# Altium PCB RcMPPT-BMS.PcbDoc (part 2 of 2)
Units mm, origin at the board's own origin, x right, y up, seen from the top; angles counter-clockwise.
Board outline 99.06 x 55.88 mm, 4 copper layers (Top Layer, Mid Layer 1, Mid Layer 2, Bottom Layer), stack 1.587 mm thick; 194 components, 140 nets, 605 pads, 158 vias.
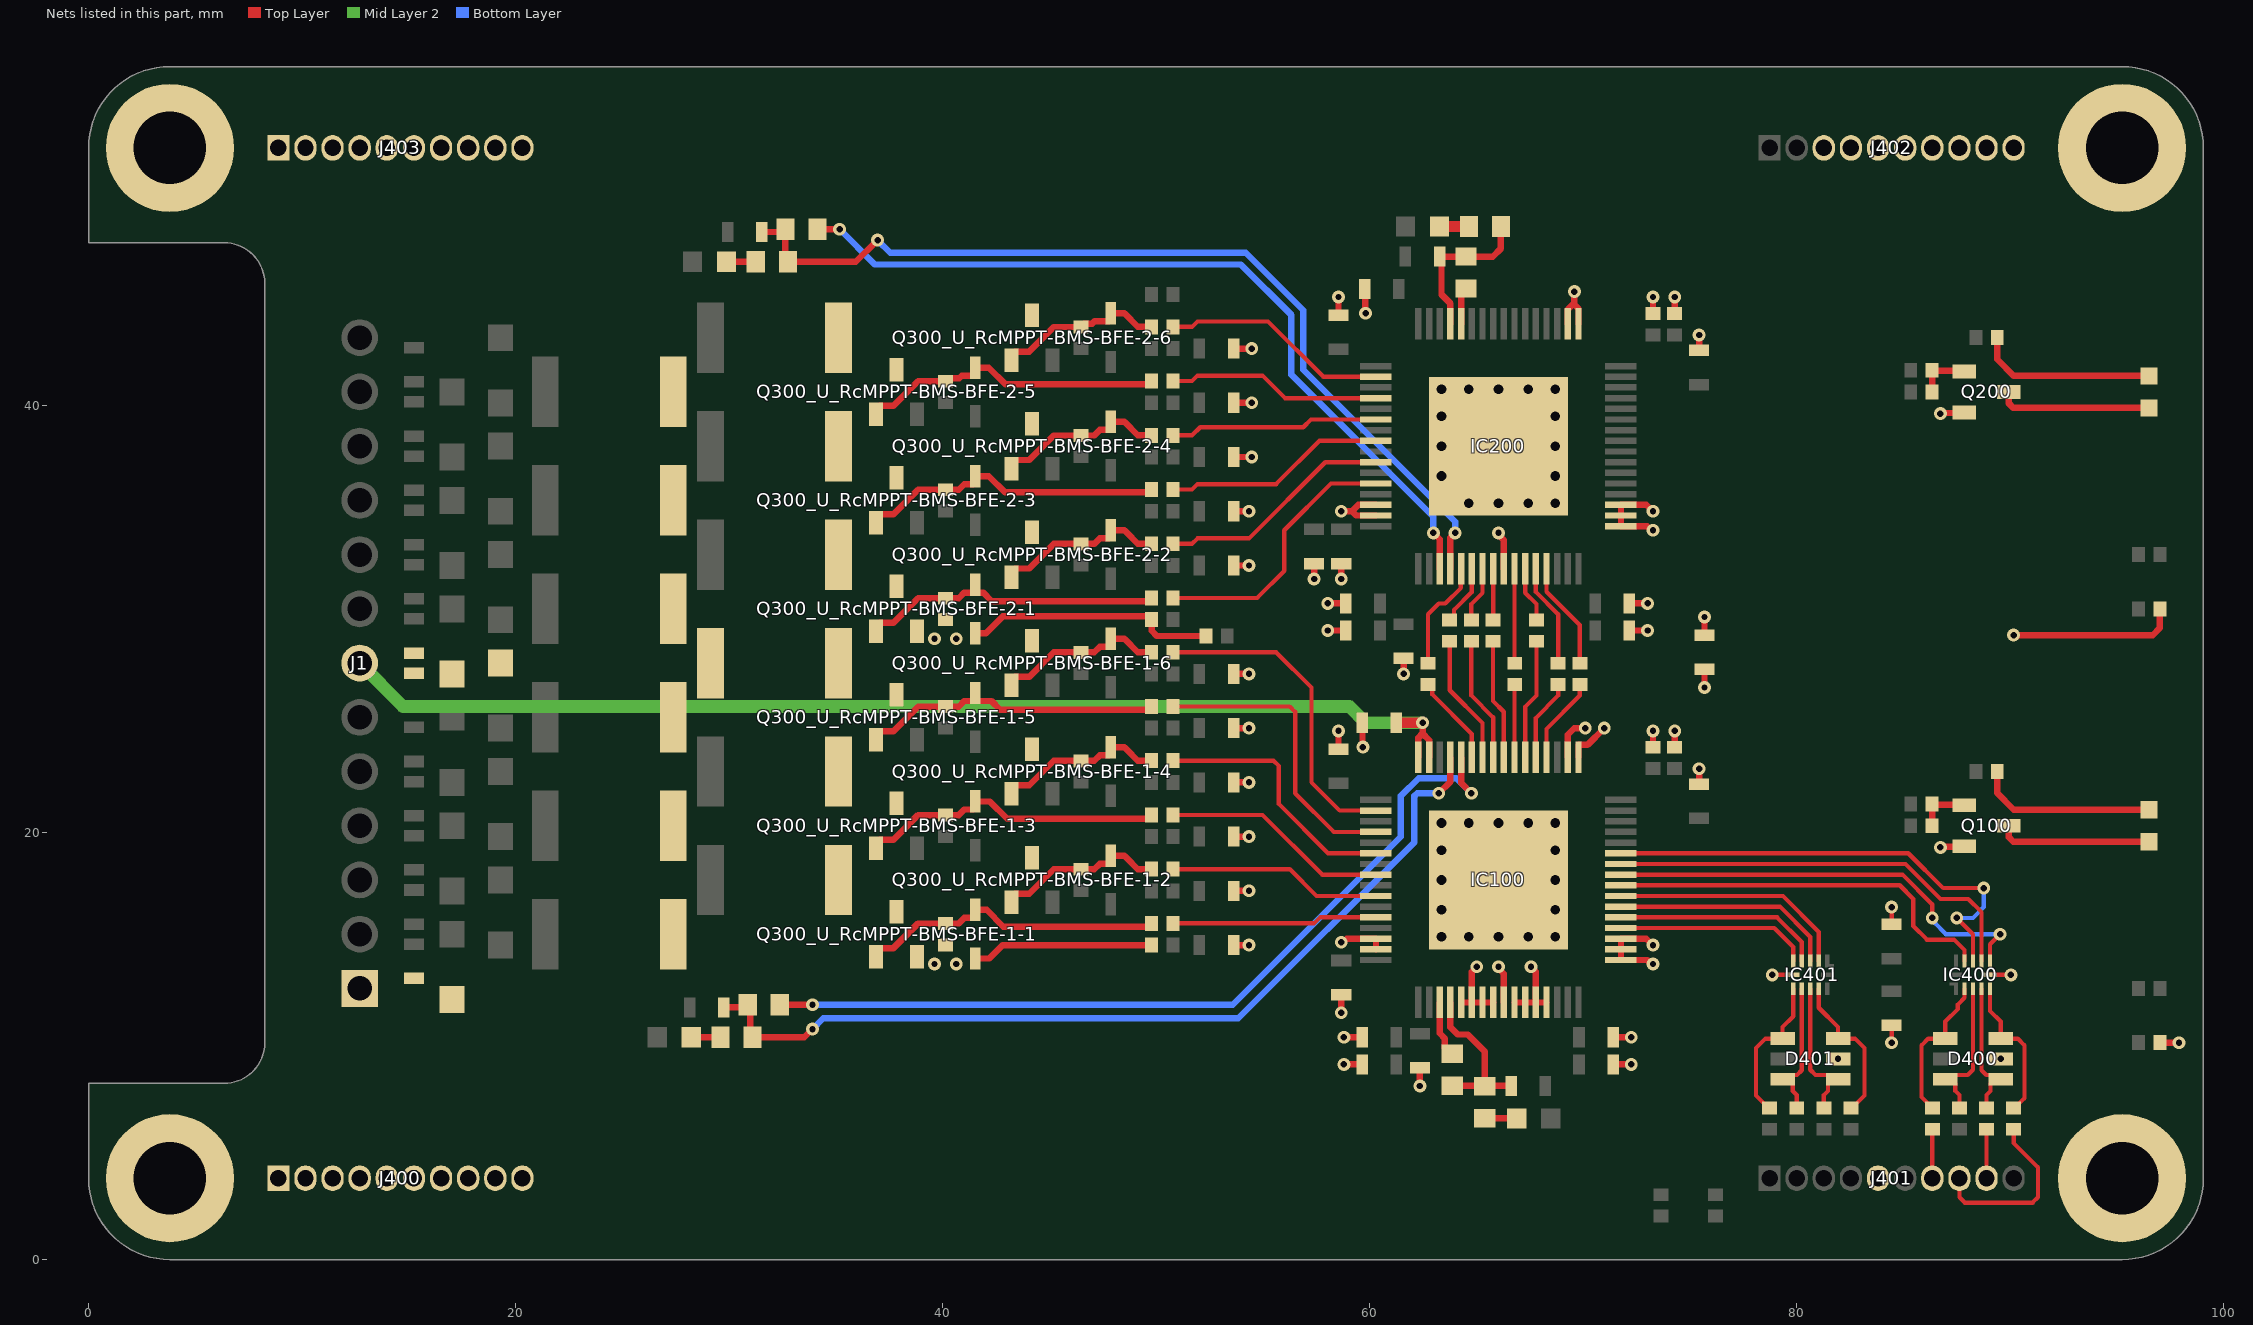
[diagram p4: the nets of this part, all layers, seen from the top]

## Via types
v1: diameter 0.6, hole 0.3, Top Layer to Bottom Layer, tented both sides, 127 vias
v2: diameter 0.85, hole 0.45, Top Layer to Bottom Layer, tented both sides, 31 vias

## Nets (pads, with @x,y where several pads share a name; then routed paths per layer and width w, separated by ;. In a path a pad name is that pad's centre, name@x,y a point inside that pad or via, vN(x,y) a via of type N, cw(c..) or ccw(c..) an arc to the next point about the centre after c; other vN are vias at no path point) (continued)
NetD301_U_RcMPPT-BMS-BFE-1-1_1: D301_U_RcMPPT-BMS-BFE-1-1.1 Q300_U_RcMPPT-BMS-BFE-1-1.1 R111.1 R301_U_RcMPPT-BMS-BFE-1-1.2 | length 14.5
  Top Layer w0.3: Q300_U_RcMPPT-BMS-BFE-1-1.1@36.886,14.19 36.886,14.415 37.061,14.59 37.704,14.59 38.854,15.74 R301_U_RcMPPT-BMS-BFE-1-1.2@40.132,15.74 40.759,15.74 41.022,16.003 41.429,16.003 41.529,16.103 D301_U_RcMPPT-BMS-BFE-1-1.1@41.529,16.378 42.067,16.378 42.85,15.596 49.642,15.596 49.792,15.746 R111.1@49.792,15.748
NetD301_U_RcMPPT-BMS-BFE-1-2_1: D301_U_RcMPPT-BMS-BFE-1-2.1 Q300_U_RcMPPT-BMS-BFE-1-2.1 R109.1 R301_U_RcMPPT-BMS-BFE-1-2.2 | length 8
  Top Layer w0.3: Q300_U_RcMPPT-BMS-BFE-1-2.1@43.236,16.73 43.236,16.955 43.411,17.13 44.054,17.13 45.204,18.28 R301_U_RcMPPT-BMS-BFE-1-2.2@46.482,18.28 47.109,18.28 47.372,18.543 47.779,18.543 47.879,18.643 D301_U_RcMPPT-BMS-BFE-1-2.1@47.879,18.918 48.519,18.918 48.64,18.797 49.149,18.288 R109.1@49.792,18.288
NetD301_U_RcMPPT-BMS-BFE-1-3_1: D301_U_RcMPPT-BMS-BFE-1-3.1 Q300_U_RcMPPT-BMS-BFE-1-3.1 R107.1 R301_U_RcMPPT-BMS-BFE-1-3.2 | length 14.5
  Top Layer w0.3: Q300_U_RcMPPT-BMS-BFE-1-3.1@36.886,19.27 36.886,19.495 37.061,19.67 37.704,19.67 38.854,20.82 R301_U_RcMPPT-BMS-BFE-1-3.2@40.132,20.82 40.759,20.82 41.022,21.083 41.429,21.083 41.529,21.183 D301_U_RcMPPT-BMS-BFE-1-3.1@41.529,21.458 42.218,21.458 43.026,20.65 49.642,20.65 49.792,20.8 R107.1@49.792,20.828
NetD301_U_RcMPPT-BMS-BFE-1-4_1: D301_U_RcMPPT-BMS-BFE-1-4.1 Q300_U_RcMPPT-BMS-BFE-1-4.1 R105.1 R301_U_RcMPPT-BMS-BFE-1-4.2 | length 8
  Top Layer w0.3: Q300_U_RcMPPT-BMS-BFE-1-4.1@43.236,21.81 43.236,22.035 43.411,22.21 44.054,22.21 45.204,23.36 R301_U_RcMPPT-BMS-BFE-1-4.2@46.482,23.36 47.109,23.36 47.372,23.623 47.779,23.623 47.879,23.723 D301_U_RcMPPT-BMS-BFE-1-4.1@47.879,23.998 48.519,23.998 48.64,23.877 49.149,23.368 R105.1@49.792,23.368
NetD301_U_RcMPPT-BMS-BFE-1-5_1: D301_U_RcMPPT-BMS-BFE-1-5.1 Q300_U_RcMPPT-BMS-BFE-1-5.1 R103.1 R301_U_RcMPPT-BMS-BFE-1-5.2 | length 14.4
  Top Layer w0.3: Q300_U_RcMPPT-BMS-BFE-1-5.1@36.886,24.35 36.886,24.575 37.061,24.75 37.704,24.75 38.854,25.9 R301_U_RcMPPT-BMS-BFE-1-5.2@40.132,25.9 40.759,25.9 41.022,26.163 41.429,26.163 D301_U_RcMPPT-BMS-BFE-1-5.1@41.529,26.263 ; D301_U_RcMPPT-BMS-BFE-1-5.1@41.529,26.538 D301_U_RcMPPT-BMS-BFE-1-5.1@41.529,26.263 ; R103.1@49.792,25.908 49.792,25.906 49.642,25.756 42.697,25.756 42.291,26.162 41.905,26.162 41.904,26.163 41.629,26.163 D301_U_RcMPPT-BMS-BFE-1-5.1@41.529,26.263
NetD301_U_RcMPPT-BMS-BFE-1-6_1: D301_U_RcMPPT-BMS-BFE-1-6.1 Q300_U_RcMPPT-BMS-BFE-1-6.1 R101.1 R301_U_RcMPPT-BMS-BFE-1-6.2 | length 8
  Top Layer w0.3: Q300_U_RcMPPT-BMS-BFE-1-6.1@43.236,26.89 43.236,27.115 43.411,27.29 44.054,27.29 45.204,28.44 R301_U_RcMPPT-BMS-BFE-1-6.2@46.482,28.44 47.109,28.44 47.372,28.703 47.779,28.703 47.879,28.803 D301_U_RcMPPT-BMS-BFE-1-6.1@47.879,29.078 48.519,29.078 49.149,28.448 R101.1@49.792,28.448
NetD301_U_RcMPPT-BMS-BFE-2-1_1: D301_U_RcMPPT-BMS-BFE-2-1.1 Q300_U_RcMPPT-BMS-BFE-2-1.1 R222.1 R301_U_RcMPPT-BMS-BFE-2-1.2 | length 14.4
  Top Layer w0.3: Q300_U_RcMPPT-BMS-BFE-2-1.1@36.886,29.43 36.886,29.655 37.061,29.83 37.704,29.83 38.854,30.98 R301_U_RcMPPT-BMS-BFE-2-1.2@40.132,30.98 40.759,30.98 41.022,31.243 41.429,31.243 D301_U_RcMPPT-BMS-BFE-2-1.1@41.529,31.343 ; D301_U_RcMPPT-BMS-BFE-2-1.1@41.529,31.618 D301_U_RcMPPT-BMS-BFE-2-1.1@41.529,31.343 ; R222.1@49.792,30.988 49.792,30.986 49.642,30.836 42.311,30.836 41.904,31.243 41.629,31.243 D301_U_RcMPPT-BMS-BFE-2-1.1@41.529,31.343
NetD301_U_RcMPPT-BMS-BFE-2-2_1: D301_U_RcMPPT-BMS-BFE-2-2.1 Q300_U_RcMPPT-BMS-BFE-2-2.1 R220.1 R301_U_RcMPPT-BMS-BFE-2-2.2 | length 8
  Top Layer w0.3: Q300_U_RcMPPT-BMS-BFE-2-2.1@43.236,31.97 43.236,32.195 43.411,32.37 44.054,32.37 45.204,33.52 R301_U_RcMPPT-BMS-BFE-2-2.2@46.482,33.52 47.109,33.52 47.372,33.783 47.779,33.783 47.879,33.883 D301_U_RcMPPT-BMS-BFE-2-2.1@47.879,34.158 48.519,34.158 48.64,34.037 49.149,33.528 R220.1@49.792,33.528
NetD301_U_RcMPPT-BMS-BFE-2-3_1: D301_U_RcMPPT-BMS-BFE-2-3.1 Q300_U_RcMPPT-BMS-BFE-2-3.1 R216.1 R301_U_RcMPPT-BMS-BFE-2-3.2 | length 14.5
  Top Layer w0.3: Q300_U_RcMPPT-BMS-BFE-2-3.1@36.886,34.51 36.886,34.735 37.061,34.91 37.704,34.91 38.854,36.06 R301_U_RcMPPT-BMS-BFE-2-3.2@40.132,36.06 40.759,36.06 41.022,36.323 41.429,36.323 41.529,36.423 D301_U_RcMPPT-BMS-BFE-2-3.1@41.529,36.698 42.169,36.698 42.926,35.941 49.665,35.941 R216.1@49.792,36.068
NetD301_U_RcMPPT-BMS-BFE-2-4_1: D301_U_RcMPPT-BMS-BFE-2-4.1 Q300_U_RcMPPT-BMS-BFE-2-4.1 R212.1 R301_U_RcMPPT-BMS-BFE-2-4.2 | length 8
  Top Layer w0.3: Q300_U_RcMPPT-BMS-BFE-2-4.1@43.236,37.05 43.236,37.275 43.411,37.45 44.054,37.45 45.204,38.6 R301_U_RcMPPT-BMS-BFE-2-4.2@46.482,38.6 47.109,38.6 47.372,38.863 47.779,38.863 47.879,38.963 D301_U_RcMPPT-BMS-BFE-2-4.1@47.879,39.238 48.519,39.238 49.149,38.608 R212.1@49.792,38.608
NetD301_U_RcMPPT-BMS-BFE-2-5_1: D301_U_RcMPPT-BMS-BFE-2-5.1 Q300_U_RcMPPT-BMS-BFE-2-5.1 R208.1 R301_U_RcMPPT-BMS-BFE-2-5.2 | length 14.5
  Top Layer w0.3: Q300_U_RcMPPT-BMS-BFE-2-5.1@36.886,39.59 36.886,39.815 37.061,39.99 37.704,39.99 38.854,41.14 R301_U_RcMPPT-BMS-BFE-2-5.2@40.132,41.14 40.282,41.29 40.782,41.29 40.895,41.403 41.429,41.403 41.529,41.503 D301_U_RcMPPT-BMS-BFE-2-5.1@41.529,41.778 42.169,41.778 42.955,40.992 49.642,40.992 49.792,41.142 R208.1@49.792,41.148
NetD301_U_RcMPPT-BMS-BFE-2-6_1: D301_U_RcMPPT-BMS-BFE-2-6.1 Q300_U_RcMPPT-BMS-BFE-2-6.1 R206.1 R301_U_RcMPPT-BMS-BFE-2-6.2 | length 8
  Top Layer w0.3: Q300_U_RcMPPT-BMS-BFE-2-6.1@43.236,42.13 43.236,42.355 43.411,42.53 44.054,42.53 45.204,43.68 R301_U_RcMPPT-BMS-BFE-2-6.2@46.482,43.68 46.632,43.83 47.005,43.83 47.118,43.943 47.779,43.943 47.879,44.043 D301_U_RcMPPT-BMS-BFE-2-6.1@47.879,44.318 48.519,44.318 49.149,43.688 R206.1@49.792,43.688
NetD400_1: D400.1 IC400.4 R406.1 | length 6.7
  Top Layer w0.2: IC400.4@88.665,12.685 88.665,8.871 88.888,8.648 89.365,8.648 D400.1@89.565,8.448 89.29,8.448 89.09,8.248 89.09,7.894 88.9,7.704 R406.1@88.9,7.104
NetD400_3: D400.3 IC400.5 R407.1 | length 7
  Top Layer w0.2: IC400.5@89.065,12.685 89.065,11.646 89.565,11.146 D400.3@89.565,10.348 90.363,10.348 90.678,10.033 90.678,7.562 90.22,7.104 R407.1@90.17,7.104
NetD400_4: D400.4 IC400.2 R404.1 | length 7.1
  Top Layer w0.2: R404.1@86.36,7.104 86.31,7.104 86.11,7.304 86.11,7.354 85.852,7.612 85.852,10.033 86.167,10.348 D400.4@86.965,10.348 86.965,11.146 87.557,11.738 87.557,11.953 87.865,12.261 87.865,12.323 IC400.2@87.865,12.685
NetD400_6: D400.6 IC400.3 R405.1 | length 7.1
  Top Layer w0.2: R405.1@87.63,7.104 87.63,7.704 87.44,7.894 87.44,8.248 87.24,8.448 D400.6@86.965,8.448 87.165,8.648 88.023,8.648 88.265,8.89 IC400.3@88.265,12.685
NetD401_1: D401.1 IC401.9 R401.1 | length 7.1
  Top Layer w0.2: IC401.9@80.645,12.685 80.645,8.89 80.887,8.648 81.745,8.648 D401.1@81.945,8.448 81.67,8.448 81.47,8.248 81.47,7.894 81.28,7.704 R401.1@81.28,7.104
NetD401_3: D401.3 IC401.10 R400.1 | length 7.2
  Top Layer w0.2: IC401.10@81.045,12.685 81.045,11.792 81.945,10.892 D401.3@81.945,10.348 82.743,10.348 83.185,9.906 83.185,7.689 82.6,7.104 R400.1@82.55,7.104
NetD401_4: D401.4 IC401.7 R403.1 | length 7.1
  Top Layer w0.2: R403.1@78.74,7.104 78.69,7.104 78.105,7.689 78.105,9.906 78.547,10.348 D401.4@79.345,10.348 79.345,10.892 79.845,11.392 IC401.7@79.845,12.685
NetD401_6: D401.6 IC401.8 R402.1 | length 6.7
  Top Layer w0.2: R402.1@80.01,7.104 80.01,7.704 79.82,7.894 79.82,8.248 79.62,8.448 D401.6@79.345,8.448 79.545,8.648 80.022,8.648 80.245,8.871 IC401.8@80.245,12.685
NetIC100_2: IC100.2 R101.2 | length 15.2
  Top Layer w0.2: R101.2@50.792,28.448 55.626,28.448 57.277,26.797 57.277,22.352 58.599,21.03 IC100.2@60.302,21.03
NetIC100_4: IC100.4 R103.2 | length 14.2
  Top Layer w0.2: R103.2@50.792,25.908 56.261,25.908 56.515,25.654 56.515,21.844 58.329,20.03 IC100.4@60.302,20.03
NetIC100_6: IC100.6 R105.2 | length 12.3
  Top Layer w0.2: R105.2@50.792,23.368 55.499,23.368 55.753,23.114 55.753,21.336 58.059,19.03 IC100.6@60.302,19.03
NetIC100_8: IC100.8 R107.2 | length 10.7
  Top Layer w0.2: R107.2@50.792,20.828 54.991,20.828 57.789,18.03 IC100.8@60.302,18.03
NetIC100_10: IC100.10 R109.2 | length 10
  Top Layer w0.2: R109.2@50.792,18.288 56.261,18.288 57.519,17.03 IC100.10@60.302,17.03
NetIC100_12: IC100.12 R111.2 | length 9.6
  Top Layer w0.2: R111.2@50.792,15.748 57.404,15.748 57.686,16.03 IC100.12@60.302,16.03
NetIC100_36: IC100.36 IC401.5 | length 9.1
  Top Layer w0.2: IC100.36@71.778,15.53 78.958,15.53 79.845,14.643 IC401.5@79.845,13.985
NetIC100_37: IC100.37 IC401.4 | length 9.8
  Top Layer w0.2: IC100.37@71.778,16.03 79.093,16.03 80.245,14.878 IC401.4@80.245,13.985
NetIC100_38: IC100.38 IC401.3 | length 10.6
  Top Layer w0.2: IC100.38@71.778,16.53 79.228,16.53 80.645,15.113 IC401.3@80.645,13.985
NetIC100_39: IC100.39 IC401.2 | length 11.3
  Top Layer w0.2: IC100.39@71.778,17.03 79.363,17.03 81.045,15.348 IC401.2@81.045,13.985
NetIC100_40: IC100.40 IC400.10 | length 18.6
  Top Layer w0.2: IC100.40@71.778,17.53 84.832,17.53 85.471,16.891 85.471,15.621 86.106,14.986 87.376,14.986 87.865,14.497 IC400.10@87.865,13.985
NetIC100_41: IC100.41 IC400.7 | length 20.8
  Top Layer w0.2: IC100.41@71.778,18.03 84.967,18.03 86.36,16.637 v1(86.36,16.002) ; IC400.7@89.065,13.985 89.065,14.77 v1(89.535,15.24)
  Bottom Layer w0.2: v1(86.36,16.002) 86.36,15.894 86.719,15.534 86.719,15.516 86.995,15.24 v1(89.535,15.24)
NetIC100_42: IC100.42 IC400.8 | length 20.1
  Top Layer w0.2: IC100.42@71.778,18.53 85.102,18.53 86.741,16.891 88.047,16.891 88.665,16.273 IC400.8@88.665,13.985
NetIC100_43: IC100.43 IC400.9 | length 22.4
  Top Layer w0.2: IC100.43@71.778,19.03 85.237,19.03 86.868,17.399 v1(88.773,17.399) ; v1(87.503,16.002) 88.265,15.24 IC400.9@88.265,13.985
  Bottom Layer w0.2: v1(87.503,16.002) 88.265,16.002 88.773,16.51 v1(88.773,17.399)
NetIC100_52: IC100.52 R8.1 | length 4.1
  Top Layer w0.2: IC100.52@68.29,23.518 68.29,24.856 69.85,26.416 R8.1@69.85,26.932
NetIC100_53: IC100.53 R7.1 | length 3.8
  Top Layer w0.2: IC100.53@67.79,23.518 67.79,25.372 68.834,26.416 R7.1@68.834,26.932
NetIC100_54: IC100.54 R4.1 | length 5.7
  Top Layer w0.2: IC100.54@67.29,23.518 67.29,25.888 67.818,26.416 R4.1@67.818,28.964
NetIC100_55: IC100.55 R6.1 | length 3.4
  Top Layer w0.2: IC100.55@66.79,23.518 66.79,26.92 R6.1@66.802,26.932
NetIC100_56: IC100.56 R3.1 | length 5.7
  Top Layer w0.2: R3.1@65.786,28.964 65.786,26.162 66.29,25.658 IC100.56@66.29,23.518
NetIC100_57: IC100.57 R2.1 | length 5.9
  Top Layer w0.2: R2.1@64.77,28.964 64.77,26.416 65.79,25.396 IC100.57@65.79,23.518
NetIC100_58: IC100.58 R1.1 | length 6.1
  Top Layer w0.2: R1.1@63.754,28.964 63.754,26.67 65.29,25.134 IC100.58@65.29,23.518
NetIC100_59: IC100.59 R5.1 | length 4.3
  Top Layer w0.2: R5.1@62.738,26.932 62.744,26.932 62.944,26.732 62.944,26.464 64.79,24.618 IC100.59@64.79,23.518
NetIC200_2: IC200.2 R206.2 | length 10.7
  Top Layer w0.2: R206.2@50.792,43.688 51.689,43.688 51.943,43.942 55.245,43.942 57.837,41.35 IC200.2@60.302,41.35
NetIC200_4: IC200.4 R208.2 | length 10.1
  Top Layer w0.2: R208.2@50.792,41.148 51.689,41.148 51.943,41.402 54.991,41.402 56.043,40.35 IC200.4@60.302,40.35
NetIC200_6: IC200.6 R212.2 | length 9.8
  Top Layer w0.2: R212.2@50.792,38.608 51.689,38.608 52.07,38.989 56.896,38.989 57.257,39.35 IC200.6@60.302,39.35
NetIC200_8: IC200.8 R216.2 | length 10.5
  Top Layer w0.2: R216.2@50.792,36.068 51.689,36.068 51.943,36.322 55.626,36.322 57.654,38.35 IC200.8@60.302,38.35
NetIC200_10: IC200.10 R220.2 | length 11.1
  Top Layer w0.2: R220.2@50.792,33.528 51.689,33.528 51.943,33.782 54.356,33.782 57.924,37.35 IC200.10@60.302,37.35
NetIC200_12: IC200.12 R222.2 | length 12.8
  Top Layer w0.2: R222.2@50.792,30.988 54.737,30.988 56.007,32.258 56.007,34.163 58.194,36.35 IC200.12@60.302,36.35
NetIC200_21: IC200.21 R5.2 | length 5.3
  Top Layer w0.2: R5.2@62.738,27.932 62.738,30.226 63.246,30.734 63.55,30.734 64.278,31.462 64.278,32.35 IC200.21@64.29,32.362
NetIC200_22: IC200.22 R1.2 | length 2.8
  Top Layer w0.2: R1.2@63.754,29.964 63.76,29.964 63.96,30.164 63.96,30.432 64.79,31.262 IC200.22@64.79,32.362
NetIC200_23: IC200.23 R2.2 | length 2.6
  Top Layer w0.2: R2.2@64.77,29.964 64.77,30.709 65.29,31.229 IC200.23@65.29,32.362
NetIC200_24: IC200.24 R3.2 | length 2.4
  Top Layer w0.2: R3.2@65.786,29.964 65.79,29.968 IC200.24@65.79,32.362
NetIC200_26: IC200.26 R6.2 | length 4.4
  Top Layer w0.2: IC200.26@66.79,32.362 66.79,27.944 R6.2@66.802,27.932
NetIC200_27: IC200.27 R4.2 | length 2.6
  Top Layer w0.2: IC200.27@67.29,32.362 67.29,31.233 67.818,30.705 R4.2@67.818,29.964
NetIC200_28: IC200.28 R7.2 | length 4.9
  Top Layer w0.2: IC200.28@67.79,32.362 67.79,31.27 68.834,30.226 R7.2@68.834,27.932
NetIC200_29: IC200.29 R8.2 | length 5.1
  Top Layer w0.2: IC200.29@68.29,32.362 68.29,31.278 69.85,29.718 R8.2@69.85,27.932
NetLED100_1: LED100.1 Q100.3 | length 7.2
  Top Layer w0.3: Q100.3@89.95,20.32 89.95,19.778 90.158,19.57 LED100.1@96.52,19.57
NetLED100_2: LED100.2 R116.1 | length 8.5
  Top Layer w0.3: R116.1@89.4,22.86 89.4,21.852 90.182,21.07 LED100.2@96.52,21.07
NetLED200_1: LED200.1 Q200.3 | length 7.2
  Top Layer w0.3: Q200.3@89.95,40.64 89.95,40.098 90.158,39.89 LED200.1@96.52,39.89
NetLED200_2: LED200.2 R200.1 | length 8.5
  Top Layer w0.3: R200.1@89.4,43.18 89.4,42.172 90.182,41.39 LED200.2@96.52,41.39
NetQ100_1: Q100.1 R117.1 R118.1 | length 2.5
  Top Layer w0.3: R118.1@86.352,20.32 R117.1@86.352,21.336 86.38,21.308 87.822,21.308 Q100.1@87.85,21.28
NetQ200_1: Q200.1 R202.1 R204.1 | length 2.5
  Top Layer w0.3: R204.1@86.352,40.64 R202.1@86.352,41.656 86.38,41.628 87.822,41.628 Q200.1@87.85,41.6
NetQ300_U_RcMPPT-BMS-BFE-1-1_3: Q300_U_RcMPPT-BMS-BFE-1-1.3 R300_U_RcMPPT-BMS-BFE-1-1.1
NetQ300_U_RcMPPT-BMS-BFE-1-2_3: Q300_U_RcMPPT-BMS-BFE-1-2.3 R300_U_RcMPPT-BMS-BFE-1-2.1
NetQ300_U_RcMPPT-BMS-BFE-1-3_3: Q300_U_RcMPPT-BMS-BFE-1-3.3 R300_U_RcMPPT-BMS-BFE-1-3.1
NetQ300_U_RcMPPT-BMS-BFE-1-4_3: Q300_U_RcMPPT-BMS-BFE-1-4.3 R300_U_RcMPPT-BMS-BFE-1-4.1
NetQ300_U_RcMPPT-BMS-BFE-1-5_3: Q300_U_RcMPPT-BMS-BFE-1-5.3 R300_U_RcMPPT-BMS-BFE-1-5.1
NetQ300_U_RcMPPT-BMS-BFE-1-6_3: Q300_U_RcMPPT-BMS-BFE-1-6.3 R300_U_RcMPPT-BMS-BFE-1-6.1
NetQ300_U_RcMPPT-BMS-BFE-2-1_3: Q300_U_RcMPPT-BMS-BFE-2-1.3 R300_U_RcMPPT-BMS-BFE-2-1.1
NetQ300_U_RcMPPT-BMS-BFE-2-2_3: Q300_U_RcMPPT-BMS-BFE-2-2.3 R300_U_RcMPPT-BMS-BFE-2-2.1
NetQ300_U_RcMPPT-BMS-BFE-2-3_3: Q300_U_RcMPPT-BMS-BFE-2-3.3 R300_U_RcMPPT-BMS-BFE-2-3.1
NetQ300_U_RcMPPT-BMS-BFE-2-4_3: Q300_U_RcMPPT-BMS-BFE-2-4.3 R300_U_RcMPPT-BMS-BFE-2-4.1
NetQ300_U_RcMPPT-BMS-BFE-2-5_3: Q300_U_RcMPPT-BMS-BFE-2-5.3 R300_U_RcMPPT-BMS-BFE-2-5.1
NetQ300_U_RcMPPT-BMS-BFE-2-6_3: Q300_U_RcMPPT-BMS-BFE-2-6.3 R300_U_RcMPPT-BMS-BFE-2-6.1
NetR121_2: R121.2 RT100.1 | length 1.5
  Top Layer w0.3: R121.2@65.405,6.616 66.879,6.616 RT100.1@66.891,6.604
NetR122_2: R122.2 RT101.1 | length 1.4
  Top Layer w0.3: RT101.1@28.232,10.414 R122.2@29.603,10.414
NetR213_2: R213.2 RT200.1 | length 1.4
  Top Layer w0.3: RT200.1@29.883,46.736 R213.2@31.254,46.736
NetR214_2: R214.2 RT201.1 | length 1.4
  Top Layer w0.5: RT201.1@63.284,48.387 R214.2@64.655,48.387
PGND1: C1.1 C100.1 C101.1 C102.1 C103.1 C104.1 C105.1 C106.1 C107.1 C108.1 C109.1 C110.1 C111.1 C112.1 C113.1 C114.1 C300_U_RcMPPT-BMS-BFE-1-1.1 C400.1 C401.1 D300_U_RcMPPT-BMS-BFE-1-1.2 D301_U_RcMPPT-BMS-BFE-1-1.2 D400.2 D401.2 IC100.14 IC100.15 IC100.21 IC100.22 IC100.23 IC100.24 IC100.25 IC100.26 IC100.27 IC100.28 IC100.29 IC100.33 IC100.34 IC100.35 IC100.49 IC100.50 IC100.65 IC400.6 IC401.6 J1.1 J400.01 J400.02 J400.03 J400.04 J400.05 J400.06 J400.07 J400.08 J400.09 J400.10 J401.05 J402.03 J402.04 J402.05 J402.06 J402.07 J402.08 J402.09 J402.10 J403.01 J403.02 J403.03 J403.04 J403.05 J403.06 J403.07 J403.08 J403.09 J403.10 pad.2 Q100.2 Q300_U_RcMPPT-BMS-BFE-1-1.2 R112.1 R114.2 R119.2 R120.2 R301_U_RcMPPT-BMS-BFE-1-1.1 | length 47.6
  Top Layer w0.2: v1(78.867,13.335) IC401.6@79.845,13.335 ; v1(84.455,10.16) C401.1@84.455,10.973 ; C400.1@84.455,15.697 v1(84.455,16.51) ; IC400.6@89.065,13.335 v1(90.043,13.335)
  Top Layer w0.3: D301_U_RcMPPT-BMS-BFE-1-1.2@41.529,14.102 42.194,14.102 42.824,14.732 R112.1@49.792,14.732 ; C106.1@53.632,14.732 v1(54.356,14.732) ; C105.1@53.632,17.272 v1(54.356,17.272) ; C104.1@53.632,19.812 v1(54.356,19.812) ; C103.1@53.632,22.352 v1(54.356,22.352) ; C102.1@53.632,24.892 v1(54.356,24.892) ; C101.1@53.632,27.432 v1(54.356,27.432) ; v1(58.547,24.765) C100.1@58.547,23.914 C100.1@58.592,23.959 ; v1(58.674,11.557) C109.1@58.674,12.408 ; v1(58.674,14.859) 58.755,14.859 58.926,15.03 IC100.14@60.302,15.03 IC100.15@60.302,14.53 ; v1(58.801,9.144) C111.1@59.652,9.144 ; v1(58.801,10.414) C110.1@59.652,10.414 ; C107.1@59.652,25.146 59.671,25.127 59.671,24.022 v1(59.69,24.003) ; v1(62.357,8.128) C112.1@62.357,8.979 ; IC100.21@64.29,12.042 IC100.22@64.79,12.042 ; v1(65.024,13.716) 64.79,13.482 IC100.22@64.79,12.042 ; IC100.24@65.79,12.042 IC100.23@65.29,12.042 IC100.22@64.79,12.042 ; v1(66.04,13.716) 66.04,13.64 66.29,13.39 IC100.25@66.29,12.042 ; IC100.26@66.79,12.042 IC100.27@67.29,12.042 IC100.28@67.79,12.042 ; v1(67.564,13.716) 67.79,13.49 IC100.28@67.79,12.042 ; IC100.29@68.29,12.042 IC100.28@67.79,12.042 ; IC100.50@69.29,23.518 69.29,24.586 69.596,24.892 v1(70.104,24.892) ; IC100.49@69.79,23.518 69.79,24.106 70.207,24.106 v1(70.993,24.892) ; C108.1@71.412,9.144 v1(72.263,9.144) ; C114.1@71.412,10.414 v1(72.263,10.414) ; v1(73.279,13.843) 73.198,13.843 73.011,14.03 IC100.33@71.778,14.03 IC100.34@71.778,14.53 IC100.35@71.778,15.03 72.965,15.03 73.263,14.732 v1(73.279,14.732) ; R120.2@73.279,23.995 v1(73.279,24.765) ; R119.2@74.295,23.995 v1(74.295,24.765) ; C113.1@75.438,22.263 v1(75.438,22.987) ; v1(75.692,26.797) C1.1@75.692,27.648 ; v1(86.741,19.304) 86.769,19.332 87.822,19.332 Q100.2@87.85,19.36 ; R114.2@97.02,10.16 v1(97.917,10.16)
  other v1: 81.945,9.398 89.565,9.398 39.624,13.843 40.64,13.843
  other v2: 63.373,15.113 64.643,15.113 66.04,15.113 67.437,15.113 68.707,15.113 63.373,16.383 68.707,16.383 63.373,17.78 68.707,17.78 63.373,19.177 68.707,19.177 63.373,20.447 64.643,20.447 66.04,20.447 67.437,20.447 68.707,20.447
PGND2: C1.2 C107.2 C200.1 C201.1 C202.1 C205.1 C206.1 C207.1 C208.1 C209.1 C210.1 C211.1 C212.1 C213.1 C214.1 C215.1 C216.1 C300_U_RcMPPT-BMS-BFE-1-6.2 C300_U_RcMPPT-BMS-BFE-2-1.1 D300_U_RcMPPT-BMS-BFE-1-6.1 D300_U_RcMPPT-BMS-BFE-2-1.2 D301_U_RcMPPT-BMS-BFE-2-1.2 IC100.63 IC100.64 IC200.14 IC200.15 IC200.25 IC200.33 IC200.34 IC200.35 IC200.49 IC200.50 IC200.65 J1.7 Q200.2 Q300_U_RcMPPT-BMS-BFE-2-1.2 R100.1 R203.2 R210.2 R211.2 R223.1 R300_U_RcMPPT-BMS-BFE-1-6.2 R301_U_RcMPPT-BMS-BFE-2-1.1 | length 102.3
  Top Layer w0.3: D301_U_RcMPPT-BMS-BFE-2-1.2@41.529,29.342 41.534,29.337 42.037,29.337 42.824,30.124 49.642,30.124 49.792,29.974 49.792,29.456 50.038,29.21 R100.1@52.34,29.21 ; C208.1@53.632,32.512 v1(54.356,32.512) ; C207.1@53.632,35.052 v1(54.356,35.052) ; C206.1@53.632,37.592 v1(54.483,37.592) ; C205.1@53.632,40.132 v1(54.483,40.132) ; C202.1@53.632,42.672 v1(54.483,42.672) ; v1(57.404,31.877) C216.1@57.404,32.601 ; v1(58.039,29.464) C211.1@58.89,29.464 ; v1(58.039,30.734) C210.1@58.89,30.734 ; C201.1@58.547,44.234 v1(58.547,45.085) ; v1(58.674,31.877) C209.1@58.674,32.601 ; v1(58.674,35.052) 59.182,35.052 ; C200.1@59.779,45.466 59.798,45.447 59.798,44.342 v1(59.817,44.323) ; IC200.15@60.302,34.85 59.384,34.85 59.182,35.052 ; IC200.14@60.302,35.35 59.48,35.35 59.182,35.052 ; v1(61.595,27.432) C213.1@61.595,28.156 ; IC100.64@62.29,23.518 62.29,24.444 62.484,24.638 ; v1(62.484,25.146) 62.484,24.638 ; IC100.63@62.79,23.518 62.79,24.332 62.484,24.638 ; v1(66.04,34.036) 66.04,33.955 66.29,33.705 IC200.25@66.29,32.362 ; IC200.50@69.29,43.838 69.29,44.498 69.596,44.804 ; 69.56,44.768 69.79,44.537 IC200.49@69.79,43.838 ; 69.596,44.732 v1(69.596,45.339) ; C214.1@72.174,29.464 v1(73.025,29.464) ; C215.1@72.174,30.734 v1(73.025,30.734) ; v1(73.279,34.163) 73.198,34.163 73.011,34.35 IC200.33@71.778,34.35 IC200.34@71.778,34.85 IC200.35@71.778,35.35 72.965,35.35 73.263,35.052 v1(73.279,35.052) ; R211.2@73.279,44.307 v1(73.279,45.085) ; R210.2@74.295,44.307 v1(74.295,45.085) ; C212.1@75.438,42.583 v1(75.438,43.307) ; C1.2@75.692,29.248 v1(75.692,30.099) ; v1(86.741,39.624) 86.769,39.652 87.822,39.652 Q200.2@87.85,39.68 ; v1(90.17,29.248) 96.685,29.248 97.02,29.583 R203.2@97.02,30.48
  Top Layer w0.5: C107.2@61.252,25.146 v1(62.484,25.146)
  Mid Layer 2 w0.6: J1.7@12.7,27.94 14.732,25.908 59.055,25.908 59.817,25.146 v1(62.484,25.146)
  other v1: 39.624,29.083 40.64,29.083
  other v2: 64.643,35.433 66.04,35.433 67.437,35.433 68.707,35.433 63.373,36.703 68.707,36.703 63.373,38.1 68.707,38.1 63.373,39.497 68.707,39.497 63.373,40.767 64.643,40.767 66.04,40.767 67.437,40.767 68.707,40.767
SCLK-IO_5: J401.07 R404.2 | length 2.3
  Top Layer w0.2: J401.07@86.36,3.81 R404.2@86.36,6.104
SDI-IO_5: J401.09 R406.2 | length 2.3
  Top Layer w0.2: J401.09@88.9,3.81 R406.2@88.9,6.104
SDO-IO_5: J401.08 R407.2 | length 8.4
  Top Layer w0.2: J401.08@87.63,3.81 87.63,2.921 87.884,2.667 91.059,2.667 91.313,2.921 91.313,4.318 90.17,5.461 R407.2@90.17,6.104
TS1+_2: C115.1 IC100.20 R121.1 R124.2 | length 7.6
  Top Layer w0.3: IC100.20@63.79,12.042 63.79,10.886 64.135,10.541 64.594,10.541 65.405,9.73 R121.1@65.405,8.14 ; R124.2@63.881,8.14 R121.1@65.405,8.14 ; R121.1@65.405,8.116 R121.1@65.405,8.14 ; C115.1@66.637,8.128 66.625,8.14 R121.1@65.405,8.14
TS1+_3: C203.1 IC200.20 R213.1 R219.2 | length 43.9
  Top Layer w0.3: C203.1@31.407,48.133 32.397,48.133 32.524,48.26 32.639,48.145 32.639,46.851 R213.1@32.754,46.736 35.941,46.736 v1(36.957,47.752) ; IC200.20@63.79,32.362 63.79,33.818 v1(64.008,34.036)
  Bottom Layer w0.3: v1(36.957,47.752) 37.546,47.163 54.204,47.163 56.896,44.471 56.896,41.677 64.008,34.565 v1(64.008,34.036)
TS1-_2: IC100.19 R124.1 | length 2.7
  Top Layer w0.3: IC100.19@63.29,12.042 63.29,10.597 63.531,10.356 63.531,9.915 63.806,9.64 R124.1@63.881,9.64
TS1-_3: IC200.19 R219.1 | length 38.6
  Top Layer w0.3: R219.1@34.151,48.26 v1(35.179,48.26) ; v1(62.992,34.036) 63.29,33.738 IC200.19@63.29,32.362
  Bottom Layer w0.3: v1(35.179,48.26) 36.83,46.609 53.975,46.609 56.342,44.242 56.342,41.448 62.992,34.798 v1(62.992,34.036)
TS2+_2: C116.1 IC100.61 R122.1 R123.2 | length 42.8
  Top Layer w0.3: C116.1@29.756,11.811 30.746,11.811 R123.2@30.873,11.938 30.988,11.823 30.988,10.529 R122.1@31.103,10.414 33.528,10.414 v1(33.909,10.795) ; v1(63.246,21.844) 63.79,22.388 IC100.61@63.79,23.518
  Bottom Layer w0.3: v1(33.909,10.795) 34.417,11.303 53.857,11.303 62.103,19.549 62.103,21.717 62.23,21.844 v1(63.246,21.844)
TS2+_3: C204.1 IC200.61 R214.1 R217.2 | length 7.4
  Top Layer w0.3: C204.1@63.284,46.99 C204.1@63.296,46.978 ; IC200.61@63.79,43.838 63.79,44.784 63.373,45.201 63.373,46.901 C204.1@63.296,46.978 ; R214.1@66.155,48.387 66.155,47.359 65.774,46.978 R217.2@64.516,46.978 C204.1@63.296,46.978
TS2-_2: IC100.60 R123.1 | length 40.1
  Top Layer w0.3: R123.1@32.373,11.938 v1(33.909,11.938) ; IC100.60@64.29,23.518 64.29,22.324 v1(64.77,21.844)
  Bottom Layer w0.3: v1(33.909,11.938) 53.594,11.938 61.468,19.812 61.468,21.717 62.299,22.548 64.066,22.548 v1(64.77,21.844)
TS2-_3: IC200.60 R217.1 | length 1.7
  Top Layer w0.3: IC200.60@64.29,43.838 64.29,45.252 R217.1@64.516,45.478
pads on no net: IC100.30 IC100.31 IC100.51 IC100.62 IC200.30 IC200.31 IC200.36 IC200.37 IC200.38 IC200.39 IC200.40 IC200.41 IC200.42 IC200.43 IC200.51 IC200.62

## Polygon pours and split planes (outlines as drawn)
NetC200_2 on Top Layer "Top Layer-NetC200_2" (solid, pour order 77): 14.77,42.44 16.033,42.44 16.433,42.04 19.379,42.04 19.889,42.55 28.196,42.55 28.506,42.24 28.506,41.53 29.756,41.53 29.756,44.83 28.506,44.83 28.506,44.122 28.194,43.81 15.82,43.81 15.71,43.92 14.77,43.92 14.647,44.043 12.7,44.043 11.837,43.18 12.7,42.317 14.647,42.317
NetC300_U_RcMPPT-BMS-BFE-2-6_1 on Top Layer "Top Layer-NetC300_U_RcMPPT-BMS-BFE-2-6_1" (solid, pour order 76): 14.893,39.777 15.17,39.5 19.889,39.5 20.399,38.99 22.009,38.99 22.009,42.29 20.759,42.29 19.849,41.38 14.77,41.38 14.647,41.503 12.7,41.503 11.837,40.64 12.7,39.777
NetC300_U_RcMPPT-BMS-BFE-2-5_1 on Top Layer "Top Layer-NetC300_U_RcMPPT-BMS-BFE-2-5_1" (solid, pour order 75): 14.77,37.36 16.033,37.36 16.433,36.96 19.379,36.96 19.889,37.47 28.196,37.47 28.506,37.16 28.506,36.45 29.756,36.45 29.756,39.75 28.506,39.75 28.506,39.042 28.194,38.73 15.82,38.73 15.71,38.84 14.77,38.84 14.647,38.963 12.7,38.963 11.837,38.1 12.7,37.237 14.647,37.237
NetC300_U_RcMPPT-BMS-BFE-2-4_1 on Top Layer "Top Layer-NetC300_U_RcMPPT-BMS-BFE-2-4_1" (solid, pour order 74): 14.893,34.697 15.17,34.42 19.889,34.42 20.399,33.91 22.009,33.91 22.009,37.21 20.759,37.21 19.849,36.3 14.77,36.3 14.647,36.423 12.7,36.423 11.837,35.56 12.7,34.697
NetC300_U_RcMPPT-BMS-BFE-2-3_1 on Top Layer "Top Layer-NetC300_U_RcMPPT-BMS-BFE-2-3_1" (solid, pour order 73): 14.77,32.28 16.033,32.28 16.433,31.88 19.379,31.88 19.889,32.39 28.196,32.39 28.506,32.08 28.506,31.37 29.756,31.37 29.756,34.67 28.506,34.67 28.506,33.962 28.194,33.65 15.82,33.65 15.71,33.76 14.77,33.76 14.647,33.883 12.7,33.883 11.837,33.02 12.7,32.157 14.647,32.157
NetC300_U_RcMPPT-BMS-BFE-2-2_1 on Top Layer "Top Layer-NetC300_U_RcMPPT-BMS-BFE-2-2_1" (solid, pour order 72): 15.17,29.34 19.889,29.34 20.399,28.83 22.009,28.83 22.009,32.13 20.759,32.13 19.849,31.22 14.77,31.22 14.647,31.343 12.7,31.343 11.837,30.48 12.7,29.617 14.893,29.617
PGND2 on Top Layer "Top Layer-PGND2" (solid, pour order 71): 14.77,27.2 16.033,27.2 16.433,26.8 19.379,26.8 19.889,27.31 28.196,27.31 28.506,27 28.506,26.29 29.756,26.29 29.756,29.59 28.506,29.59 28.506,28.882 28.194,28.57 15.82,28.57 15.71,28.68 14.77,28.68 14.647,28.803 12.7,28.803 11.837,27.94 12.7,27.077 14.647,27.077
NetC300_U_RcMPPT-BMS-BFE-1-6_1 on Top Layer "Top Layer-NetC300_U_RcMPPT-BMS-BFE-1-6_1" (solid, pour order 70): 15.17,24.26 19.889,24.26 20.399,23.75 22.009,23.75 22.009,27.05 20.759,27.05 19.849,26.14 14.77,26.14 14.647,26.263 12.7,26.263 11.837,25.4 12.7,24.537 14.893,24.537
NetC300_U_RcMPPT-BMS-BFE-1-5_1 on Top Layer "Top Layer-NetC300_U_RcMPPT-BMS-BFE-1-5_1" (solid, pour order 69): 14.77,22.12 16.033,22.12 16.433,21.72 19.379,21.72 19.889,22.23 28.196,22.23 28.506,21.92 28.506,21.21 29.756,21.21 29.756,24.51 28.506,24.51 28.506,23.802 28.194,23.49 15.82,23.49 15.71,23.6 14.77,23.6 14.647,23.723 12.7,23.723 11.837,22.86 12.7,21.997 14.647,21.997
NetC300_U_RcMPPT-BMS-BFE-1-4_1 on Top Layer "Top Layer-NetC300_U_RcMPPT-BMS-BFE-1-4_1" (solid, pour order 68): 15.17,19.18 19.889,19.18 20.399,18.67 22.009,18.67 22.009,21.97 20.759,21.97 19.849,21.06 14.77,21.06 14.647,21.183 12.7,21.183 11.837,20.32 12.7,19.457 14.893,19.457
NetC300_U_RcMPPT-BMS-BFE-1-3_1 on Top Layer "Top Layer-NetC300_U_RcMPPT-BMS-BFE-1-3_1" (solid, pour order 67): 14.77,17.04 16.033,17.04 16.433,16.64 19.379,16.64 19.889,17.15 28.196,17.15 28.506,16.84 28.506,16.13 29.756,16.13 29.756,19.43 28.506,19.43 28.506,18.722 28.194,18.41 15.82,18.41 15.71,18.52 14.77,18.52 14.647,18.643 12.7,18.643 11.837,17.78 12.7,16.917 14.647,16.917
NetC300_U_RcMPPT-BMS-BFE-1-2_1 on Top Layer "Top Layer-NetC300_U_RcMPPT-BMS-BFE-1-2_1" (solid, pour order 66): 14.893,14.377 15.17,14.1 19.889,14.1 20.399,13.59 22.009,13.59 22.009,16.89 20.759,16.89 19.849,15.98 14.77,15.98 14.647,16.103 12.7,16.103 11.837,15.24 12.7,14.377
PGND1 on Top Layer "Top Layer-PGND1" (solid, pour order 65): 14.77,11.96 16.033,11.96 16.433,11.56 17.603,11.56 17.603,12.82 17.093,13.33 15.82,13.33 15.71,13.44 14.77,13.44 14.647,13.563 12.7,13.563 11.837,12.7 12.7,11.837 14.647,11.837
NetQ300_U_RcMPPT-BMS-BFE-2-6_3 on Top Layer "NETQ300_U_RCMPPT-BMS-BFE-2-6_3_L01_P049" (solid, pour order 49): 42.291,42.57 42.901,43.18 44.021,43.18 44.521,43.68 44.521,44.78 43.154,44.78 42.164,43.79 36.098,43.79 35.756,44.132 35.756,44.83 34.506,44.83 34.506,41.53 35.756,41.53 35.756,42.229 36.097,42.57
NetC300_U_RcMPPT-BMS-BFE-2-6_1 on Top Layer "NETC300_U_RCMPPT-BMS-BFE-2-6_1_L01_P048" (solid, pour order 48): 44.831,41.58 44.894,41.517 48.129,41.517 48.129,42.567 47.716,42.98 45.131,42.98 44.831,42.68
NetC300_U_RcMPPT-BMS-BFE-2-5_1 on Top Layer "NETC300_U_RCMPPT-BMS-BFE-2-5_1_L01_P047" (solid, pour order 47): 38.481,39.04 38.544,38.977 41.779,38.977 41.779,40.027 41.366,40.44 38.781,40.44 38.481,40.14
NetQ300_U_RcMPPT-BMS-BFE-2-5_3 on Top Layer "NETQ300_U_RCMPPT-BMS-BFE-2-5_3_L01_P045" (solid, pour order 45): 26.759,38.99 28.009,38.99 28.009,39.689 28.35,40.03 35.961,40.03 36.371,40.44 37.471,40.44 38.171,41.14 38.171,42.24 37.038,42.24 36.048,41.25 28.351,41.25 28.009,41.592 28.009,42.29 26.759,42.29
NetQ300_U_RcMPPT-BMS-BFE-2-4_3 on Top Layer "NETQ300_U_RCMPPT-BMS-BFE-2-4_3_L01_P037" (solid, pour order 37): 42.291,37.49 42.901,38.1 44.021,38.1 44.521,38.6 44.521,39.7 43.154,39.7 42.164,38.71 36.098,38.71 35.756,39.052 35.756,39.75 34.506,39.75 34.506,36.45 35.756,36.45 35.756,37.149 36.097,37.49
NetC300_U_RcMPPT-BMS-BFE-2-4_1 on Top Layer "NETC300_U_RCMPPT-BMS-BFE-2-4_1_L01_P036" (solid, pour order 36): 44.831,36.5 44.894,36.437 48.129,36.437 48.129,37.487 47.716,37.9 45.131,37.9 44.831,37.6
NetC300_U_RcMPPT-BMS-BFE-2-3_1 on Top Layer "NETC300_U_RCMPPT-BMS-BFE-2-3_1_L01_P035" (solid, pour order 35): 38.481,33.96 38.544,33.897 41.779,33.897 41.779,34.947 41.366,35.36 38.781,35.36 38.481,35.06
NetQ300_U_RcMPPT-BMS-BFE-2-3_3 on Top Layer "NETQ300_U_RCMPPT-BMS-BFE-2-3_3_L01_P033" (solid, pour order 33): 26.759,33.91 28.009,33.91 28.009,34.609 28.35,34.95 35.961,34.95 36.371,35.36 37.471,35.36 38.171,36.06 38.171,37.16 37.038,37.16 36.048,36.17 28.351,36.17 28.009,36.512 28.009,37.21 26.759,37.21
NetQ300_U_RcMPPT-BMS-BFE-2-2_3 on Top Layer "NETQ300_U_RCMPPT-BMS-BFE-2-2_3_L01_P031" (solid, pour order 31): 42.291,32.41 42.901,33.02 44.021,33.02 44.521,33.52 44.521,34.62 43.154,34.62 42.164,33.63 36.098,33.63 35.756,33.972 35.756,34.67 34.506,34.67 34.506,31.37 35.756,31.37 35.756,32.069 36.097,32.41
NetC300_U_RcMPPT-BMS-BFE-2-2_1 on Top Layer "NETC300_U_RCMPPT-BMS-BFE-2-2_1_L01_P030" (solid, pour order 30): 44.831,31.42 44.894,31.357 48.129,31.357 48.129,32.407 47.716,32.82 45.131,32.82 44.831,32.52
PGND2 on Top Layer "PGND2_L01_P029" (solid, pour order 29): 38.481,28.88 38.544,28.817 41.779,28.817 41.779,29.867 41.366,30.28 38.781,30.28 38.481,29.98
NetQ300_U_RcMPPT-BMS-BFE-2-1_3 on Top Layer "NETQ300_U_RCMPPT-BMS-BFE-2-1_3_L01_P027" (solid, pour order 27): 26.759,28.83 28.009,28.83 28.009,29.529 28.35,29.87 35.961,29.87 36.371,30.28 37.471,30.28 38.171,30.98 38.171,32.08 37.038,32.08 36.048,31.09 28.351,31.09 28.009,31.432 28.009,32.13 26.759,32.13
NetQ300_U_RcMPPT-BMS-BFE-1-6_3 on Top Layer "NETQ300_U_RCMPPT-BMS-BFE-1-6_3_L01_P025" (solid, pour order 25): 42.291,27.33 42.901,27.94 44.021,27.94 44.521,28.44 44.521,29.54 43.154,29.54 42.164,28.55 36.098,28.55 35.756,28.892 35.756,29.59 34.506,29.59 34.506,26.29 35.756,26.29 35.756,26.989 36.097,27.33
NetC300_U_RcMPPT-BMS-BFE-1-6_1 on Top Layer "NETC300_U_RCMPPT-BMS-BFE-1-6_1_L01_P024" (solid, pour order 24): 44.831,26.34 44.894,26.277 48.129,26.277 48.129,27.327 47.716,27.74 45.131,27.74 44.831,27.44
NetC300_U_RcMPPT-BMS-BFE-1-5_1 on Top Layer "NETC300_U_RCMPPT-BMS-BFE-1-5_1_L01_P023" (solid, pour order 23): 38.481,23.8 38.544,23.737 41.779,23.737 41.779,24.787 41.366,25.2 38.781,25.2 38.481,24.9
NetQ300_U_RcMPPT-BMS-BFE-1-5_3 on Top Layer "NETQ300_U_RCMPPT-BMS-BFE-1-5_3_L01_P021" (solid, pour order 21): 26.759,23.75 28.009,23.75 28.009,24.449 28.35,24.79 35.961,24.79 36.371,25.2 37.471,25.2 38.171,25.9 38.171,27 37.038,27 36.048,26.01 28.351,26.01 28.009,26.352 28.009,27.05 26.759,27.05
NetQ300_U_RcMPPT-BMS-BFE-1-4_3 on Top Layer "NETQ300_U_RCMPPT-BMS-BFE-1-4_3_L01_P019" (solid, pour order 19): 42.291,22.25 42.901,22.86 44.021,22.86 44.521,23.36 44.521,24.46 43.154,24.46 42.164,23.47 36.098,23.47 35.756,23.812 35.756,24.51 34.506,24.51 34.506,21.21 35.756,21.21 35.756,21.909 36.097,22.25
NetC300_U_RcMPPT-BMS-BFE-1-4_1 on Top Layer "NETC300_U_RCMPPT-BMS-BFE-1-4_1_L01_P018" (solid, pour order 18): 44.831,21.26 44.894,21.197 48.129,21.197 48.129,22.247 47.716,22.66 45.131,22.66 44.831,22.36
PGND1 on Top Layer "PGND1_L01_P015" (solid, pour order 15): 38.481,13.64 38.544,13.577 41.779,13.577 41.779,14.627 41.366,15.04 38.781,15.04 38.481,14.74
NetC300_U_RcMPPT-BMS-BFE-1-3_1 on Top Layer "NETC300_U_RCMPPT-BMS-BFE-1-3_1_L01_P017" (solid, pour order 17): 38.481,18.72 38.544,18.657 41.779,18.657 41.779,19.707 41.366,20.12 38.781,20.12 38.481,19.82
NetC300_U_RcMPPT-BMS-BFE-1-2_1 on Top Layer "NETC300_U_RCMPPT-BMS-BFE-1-2_1_L01_P016" (solid, pour order 16): 44.831,16.18 44.894,16.117 48.129,16.117 48.129,17.167 47.716,17.58 45.131,17.58 44.831,17.28
NetC300_U_RcMPPT-BMS-BFE-1-6_1 on Top Layer "NETC300_U_RCMPPT-BMS-BFE-1-6_1_L01_P014" (solid, pour order 14): 14.77,24.66 15.17,24.26 19.889,24.26 20.399,23.75 22.009,23.75 22.009,27.05 20.759,27.05 19.849,26.14 14.77,26.14
NetQ300_U_RcMPPT-BMS-BFE-1-2_3 on Top Layer "NETQ300_U_RCMPPT-BMS-BFE-1-2_3_L01_P004" (solid, pour order 4): 42.291,17.17 42.901,17.78 44.021,17.78 44.521,18.28 44.521,19.38 43.154,19.38 42.164,18.39 36.098,18.39 35.756,18.732 35.756,19.43 34.506,19.43 34.506,16.13 35.756,16.13 35.756,16.829 36.097,17.17
NetQ300_U_RcMPPT-BMS-BFE-1-1_3 on Top Layer "NETQ300_U_RCMPPT-BMS-BFE-1-1_3_L01_P003" (solid, pour order 3): 26.759,13.59 28.009,13.59 28.009,14.289 28.35,14.63 35.961,14.63 36.371,15.04 37.471,15.04 38.171,15.74 38.171,16.84 37.038,16.84 36.048,15.85 28.351,15.85 28.009,16.192 28.009,16.89 26.759,16.89
NetQ300_U_RcMPPT-BMS-BFE-1-3_3 on Top Layer "NETQ300_U_RCMPPT-BMS-BFE-1-3_3_L01_P002" (solid, pour order 2): 26.759,18.67 28.009,18.67 28.009,19.369 28.35,19.71 35.961,19.71 36.371,20.12 37.471,20.12 38.171,20.82 38.171,21.92 37.038,21.92 36.048,20.93 28.351,20.93 28.009,21.272 28.009,21.97 26.759,21.97
NetC200_2 on Bottom Layer "NETC200_2_L04_P087" (solid, pour order 87): 14.77,43.38 13.707,42.317 12.7,42.317 11.837,43.18 12.7,44.043 13.292,44.043 14.77,45.52 41.366,45.52 41.779,45.107 41.779,44.057 41.102,43.38
NetC300_U_RcMPPT-BMS-BFE-2-6_1 on Bottom Layer "NETC300_U_RCMPPT-BMS-BFE-2-6_1_L04_P086" (solid, pour order 86): 14.77,40.84 13.707,39.777 12.7,39.777 11.837,40.64 12.7,41.503 13.292,41.503 14.77,42.98 47.716,42.98 48.129,42.567 48.129,41.517 47.452,40.84
NetC300_U_RcMPPT-BMS-BFE-2-5_1 on Bottom Layer "NETC300_U_RCMPPT-BMS-BFE-2-5_1_L04_P085" (solid, pour order 85): 14.77,38.3 13.707,37.237 12.7,37.237 11.837,38.1 12.7,38.963 13.292,38.963 14.77,40.44 41.366,40.44 41.779,40.027 41.779,38.977 41.102,38.3
NetC300_U_RcMPPT-BMS-BFE-2-4_1 on Bottom Layer "NETC300_U_RCMPPT-BMS-BFE-2-4_1_L04_P084" (solid, pour order 84): 14.77,35.76 13.707,34.697 12.7,34.697 11.837,35.56 12.7,36.423 13.292,36.423 14.77,37.9 47.716,37.9 48.129,37.487 48.129,36.437 47.452,35.76
NetC300_U_RcMPPT-BMS-BFE-2-3_1 on Bottom Layer "NETC300_U_RCMPPT-BMS-BFE-2-3_1_L04_P083" (solid, pour order 83): 14.77,33.22 13.707,32.157 12.7,32.157 11.837,33.02 12.7,33.883 13.292,33.883 14.77,35.36 41.366,35.36 41.779,34.947 41.779,33.897 41.102,33.22
NetC300_U_RcMPPT-BMS-BFE-2-2_1 on Bottom Layer "NETC300_U_RCMPPT-BMS-BFE-2-2_1_L04_P082" (solid, pour order 82): 14.77,30.68 13.707,29.617 12.7,29.617 11.837,30.48 12.7,31.343 13.292,31.343 14.77,32.82 47.716,32.82 48.129,32.407 48.129,31.357 47.452,30.68
PGND2 on Bottom Layer "PGND2_L04_P081" (solid, pour order 81): 14.77,28.14 13.707,27.077 12.7,27.077 11.837,27.94 12.7,28.803 13.292,28.803 14.77,30.28 41.366,30.28 41.779,29.867 41.779,28.817 41.102,28.14
NetC300_U_RcMPPT-BMS-BFE-1-6_1 on Bottom Layer "NETC300_U_RCMPPT-BMS-BFE-1-6_1_L04_P080" (solid, pour order 80): 14.77,25.6 13.707,24.537 12.7,24.537 11.837,25.4 12.7,26.263 13.292,26.263 14.77,27.74 47.716,27.74 48.129,27.327 48.129,26.277 47.452,25.6
NetC300_U_RcMPPT-BMS-BFE-1-5_1 on Bottom Layer "NETC300_U_RCMPPT-BMS-BFE-1-5_1_L04_P079" (solid, pour order 79): 14.77,23.06 13.707,21.997 12.7,21.997 11.837,22.86 12.7,23.723 13.292,23.723 14.77,25.2 41.366,25.2 41.779,24.787 41.779,23.737 41.102,23.06
NetC300_U_RcMPPT-BMS-BFE-1-4_1 on Bottom Layer "NETC300_U_RCMPPT-BMS-BFE-1-4_1_L04_P078" (solid, pour order 78): 14.77,20.52 13.707,19.457 12.7,19.457 11.837,20.32 12.7,21.183 13.292,21.183 14.77,22.66 47.716,22.66 48.129,22.247 48.129,21.197 47.452,20.52
NetC300_U_RcMPPT-BMS-BFE-1-3_1 on Bottom Layer "NETC300_U_RCMPPT-BMS-BFE-1-3_1_L04_P010" (solid, pour order 10): 14.77,17.98 13.707,16.917 12.7,16.917 11.837,17.78 12.7,18.643 13.292,18.643 14.77,20.12 41.366,20.12 41.779,19.707 41.779,18.657 41.102,17.98
PGND1 on Bottom Layer "PGND1_L04_P009" (solid, pour order 9): 14.77,12.9 13.707,11.837 12.7,11.837 12.7,13.563 13.292,13.563 14.77,15.04 41.366,15.04 41.779,14.627 41.779,13.577 41.102,12.9
NetC300_U_RcMPPT-BMS-BFE-1-2_1 on Bottom Layer "NETC300_U_RCMPPT-BMS-BFE-1-2_1_L04_P008" (solid, pour order 8): 14.77,15.44 13.707,14.377 12.7,14.377 11.837,15.24 12.7,16.103 13.292,16.103 14.77,17.58 47.716,17.58 48.129,17.167 48.129,16.117 47.452,15.44
PGND1 on Mid Layer 1 "PGND1_L02_P090" (solid, pour order 90): 99.06,55.88 0,55.88 0,0 99.06,0
PGND2 on Mid Layer 1 "PGND2_L02_P088" (solid, pour order 88): 57.277,29.083 60.325,26.035 62.861,26.035 64.64,24.256 64.64,22.78 68.44,22.78 68.44,24.256 71.247,27.063 71.247,28.448 90.932,28.448 90.932,49.149 16.891,49.149 12.7,44.958 12.7,27.94 41.021,27.94 43.18,30.099 57.277,30.099
PGND1 on Mid Layer 2 "NONET_L-01_P-001" (solid, pour order 96): 0,55.88 99.06,55.88 99.06,0 0,0
PGND2 on Mid Layer 2 "PGND2_L03_P091" (solid, pour order 91): 57.277,29.083 60.325,26.035 62.861,26.035 64.64,24.256 64.64,22.78 68.44,22.78 68.44,24.256 71.247,27.063 71.247,28.448 90.932,28.448 90.932,49.149 16.891,49.149 12.7,44.958 12.7,27.94 41.021,27.94 43.18,30.099 57.277,30.099
5V-LS on Mid Layer 2 "5V-LS_L03_P095" (solid, pour order 95): 74.676,10.16 74.676,17.666 72.921,17.666 72.921,18.542 85.979,18.542 91.186,13.335 78.359,13.335 77.47,12.446 77.47,1.651 72.136,1.651 72.136,7.62
3V3-IO on Mid Layer 2 "3V3-IO_L03_P094" (solid, pour order 94): 91.17,13.208 91.17,0 77.74,0 77.74,12.462 78.486,13.208

## Keep-outs
Keep-Out Layer:
  lines w0.254: 0,8.255 0,3.81 ccw(c3.81,3.81) 3.81,0 95.25,0 ccw(c95.25,3.81) 99.06,3.81 99.06,52.07 ccw(c95.25,52.07) 95.25,55.88 67.31,55.88 31.75,55.88 ; 0,8.255 0,8.255 ; 0,8.255 6.35,8.255 ccw(c6.35,10.16) 8.255,10.16 8.255,45.72 ccw(c6.35,45.72) 6.35,47.625 0,47.625 0,52.07 cw(c3.81,52.07) 3.81,55.88 31.75,55.88 ; 31.75,55.88 31.75,55.88 ; 8.255,41.91 8.255,41.91

## Silkscreen, mask and mechanical layers (free items; w line width, h text height)
Top Overlay:
  drawing of 31 lines, arcs and shapes, not listed
  text "Cell 6-12 / Status" at 84.84,43.18 h1.27
  text "H-Select" at 86.618,35.814 h1.52
  text "S" at 93.472,32.258 h1.52
  text "H" at 93.472,29.718 h1.52
  text "Cell 0-6 / Status" at 86.914,22.86 h1.27
  text "H-Select" at 86.618,15.494 h1.52
  text "S" at 93.472,11.938 h1.52
  text "H" at 93.472,9.398 h1.52
  text "RcMPPT" at 38.858,6.981 h1.5
  text "BMS" at 49.78,6.981 h1.5
  text "Thomas Hofmann" at 40.409,4.976 h0.9
  text "INT" at 77.089,4.509 h1.27 r90
  text "EXT" at 74.549,4.403 h1.27 r90
  text "IO-Supply Selection" at 60.286,0.889 h1.27
Bottom Overlay:
  text "5V" at 79.351,50.292 h0.92 r90
  text "5V" at 80.621,50.292 h0.92 r90
  text "CELL 12" at 22.728,42.569 h0.92
  text "CELL 11" at 20.875,40.029 h0.92
  text "CELL 10" at 23.158,37.489 h0.92
  text "CELL 9" at 20.11,34.949 h0.92
  text "CELL 8" at 20.11,32.409 h0.92
  text "CELL 7" at 20.11,29.869 h0.92
  text "CELL 6" at 20.11,27.33 h0.92
  text "CELL 5" at 20.11,24.789 h0.92
  text "CELL 4" at 20.11,22.249 h0.92
  text "CELL 3" at 20.11,19.709 h0.92
  text "Bridge unused Terminals" at 9.142,17.488 h0.92 r270
  text "CELL 2" at 23.154,17.169 h0.92
  text "CELL 1" at 20.11,14.629 h0.92
  text "PACK -" at 21.946,12.089 h0.92
  text "CONV" at 78.129,5.588 h0.92 r270
  text "DRDY" at 79.399,5.588 h0.92 r270
  text "ALERT" at 80.669,5.588 h0.92 r270
  text "FAULT" at 81.939,5.588 h0.92 r270
  text "PGND" at 83.209,5.588 h0.92 r270
  text "3V3" at 84.479,5.588 h0.92 r270
  text "SCLK" at 85.749,5.588 h0.92 r270
  text "SDO" at 87.019,5.588 h0.92 r270
  text "SDI" at 88.289,5.588 h0.92 r270
  text "NCS" at 89.559,5.588 h0.92 r270
Board:
  lines w0.254: 31.75,55.88 31.75,55.88 ; 31.75,55.88 3.81,55.88 ccw(c3.81,52.07) 0,52.07 0,47.625 6.35,47.625 cw(c6.35,45.72) 8.255,45.72 8.255,10.16 cw(c6.35,10.16) 6.35,8.255 0,8.255 0,3.81 ccw(c3.81,3.81) 3.81,0 95.25,0 ccw(c95.25,3.81) 99.06,3.81 99.06,52.07 ccw(c95.25,52.07) 95.25,55.88 67.31,55.88 ; 31.75,55.88 31.75,55.88 ; 31.75,55.88 31.75,55.88 ; 31.75,55.88 67.31,55.88 ; 67.31,55.88 67.31,55.88